# Altium PCB Board_v1_p2.PcbDoc
Units mm, origin at the board's own origin, x right, y up, seen from the top; angles counter-clockwise.
Board outline 33 x 33 mm, 4 copper layers (Top Layer, Layer 1, Layer 2, Bottom Layer), stack 0.904 mm thick; 26 components, 41 nets, 74 pads, 13 vias.
Unrouted connection lines stored in the file: 3.
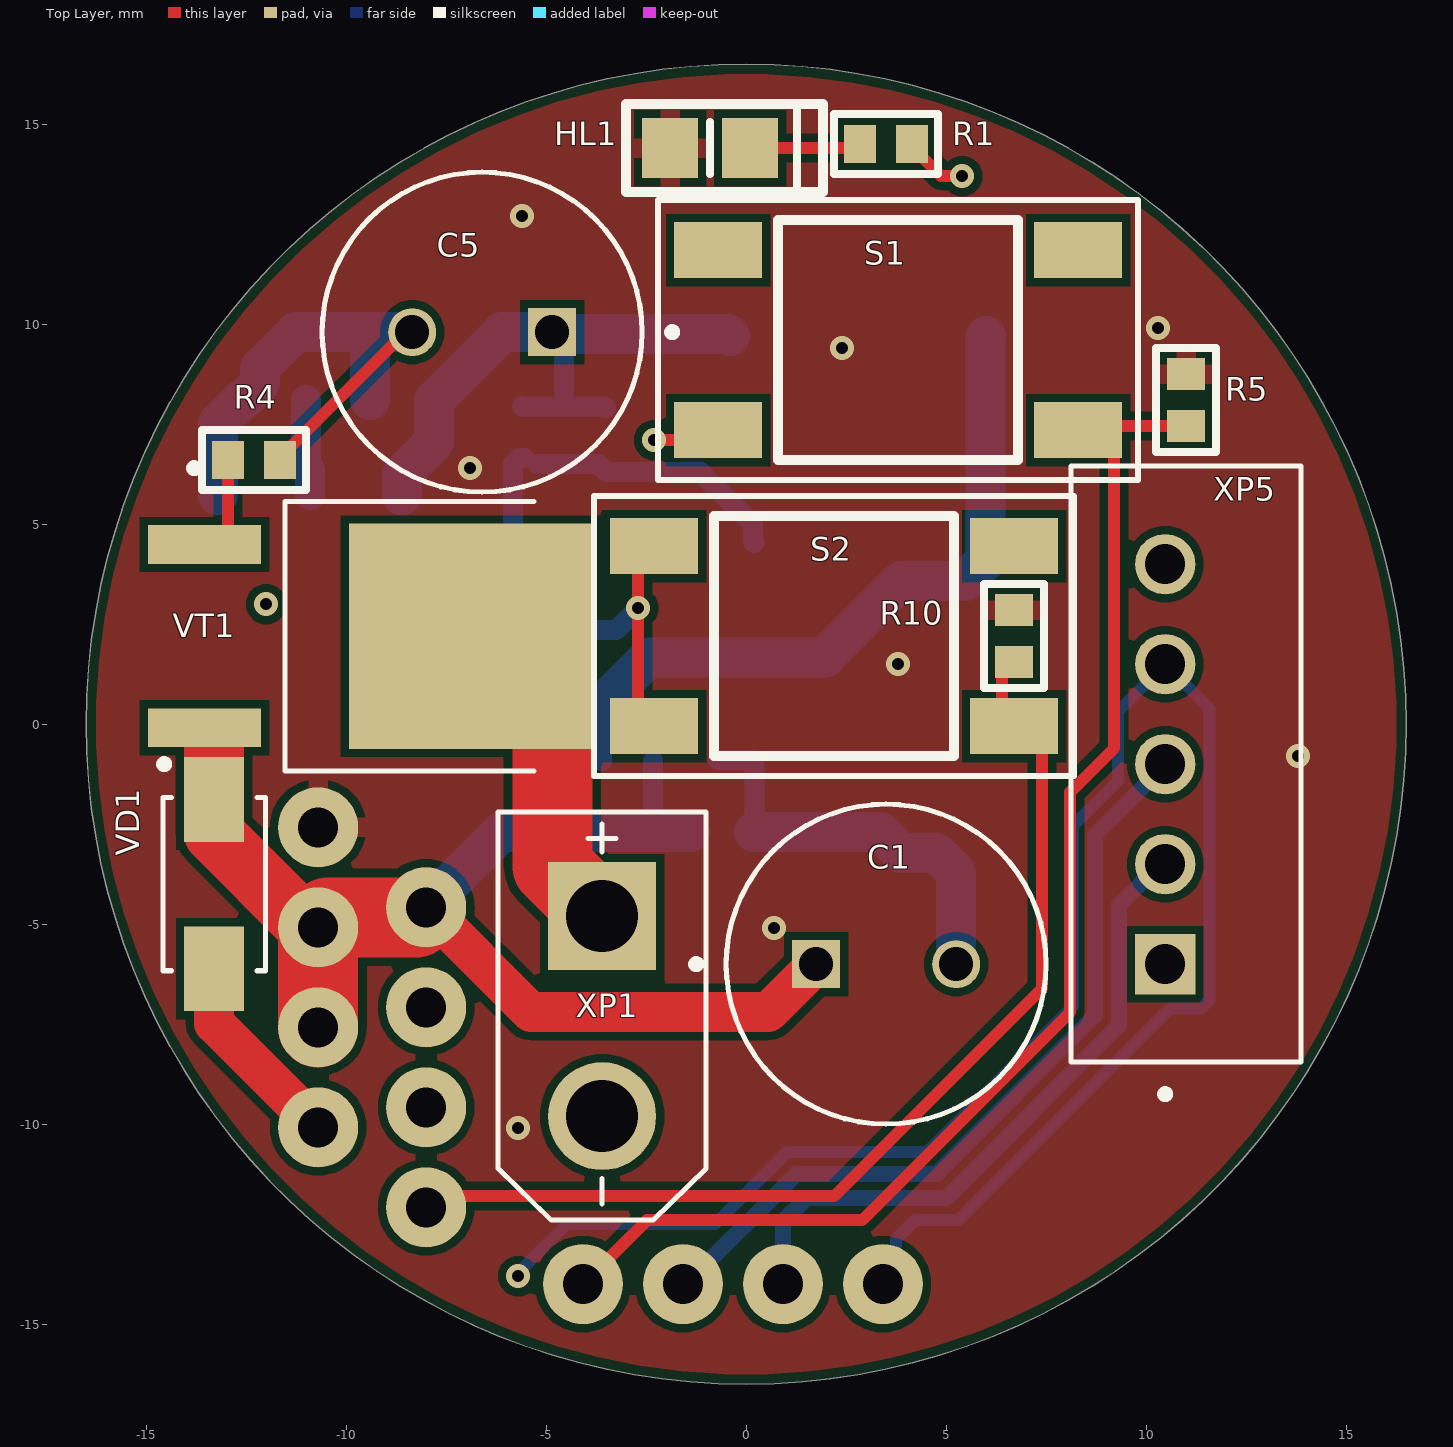
[diagram p0: Top Layer view]
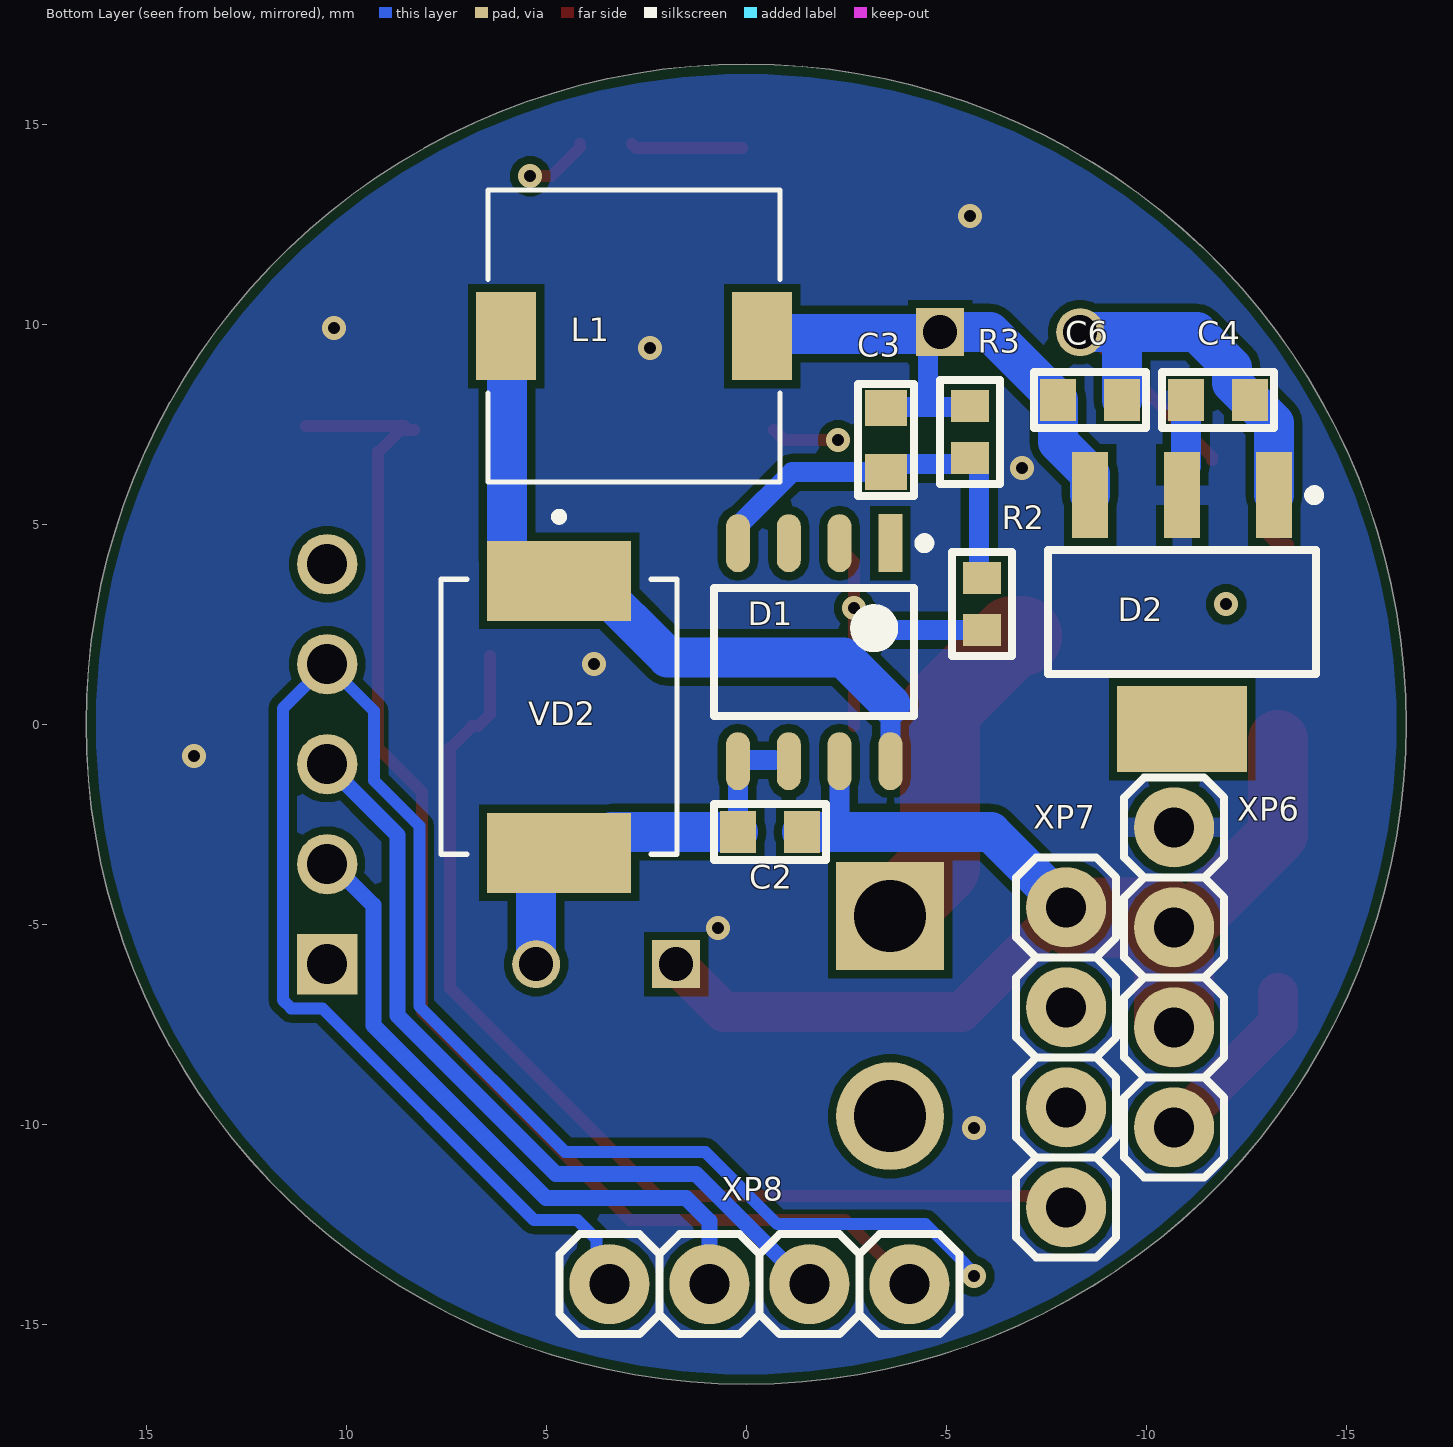
[diagram p1: Bottom Layer view, seen from below]
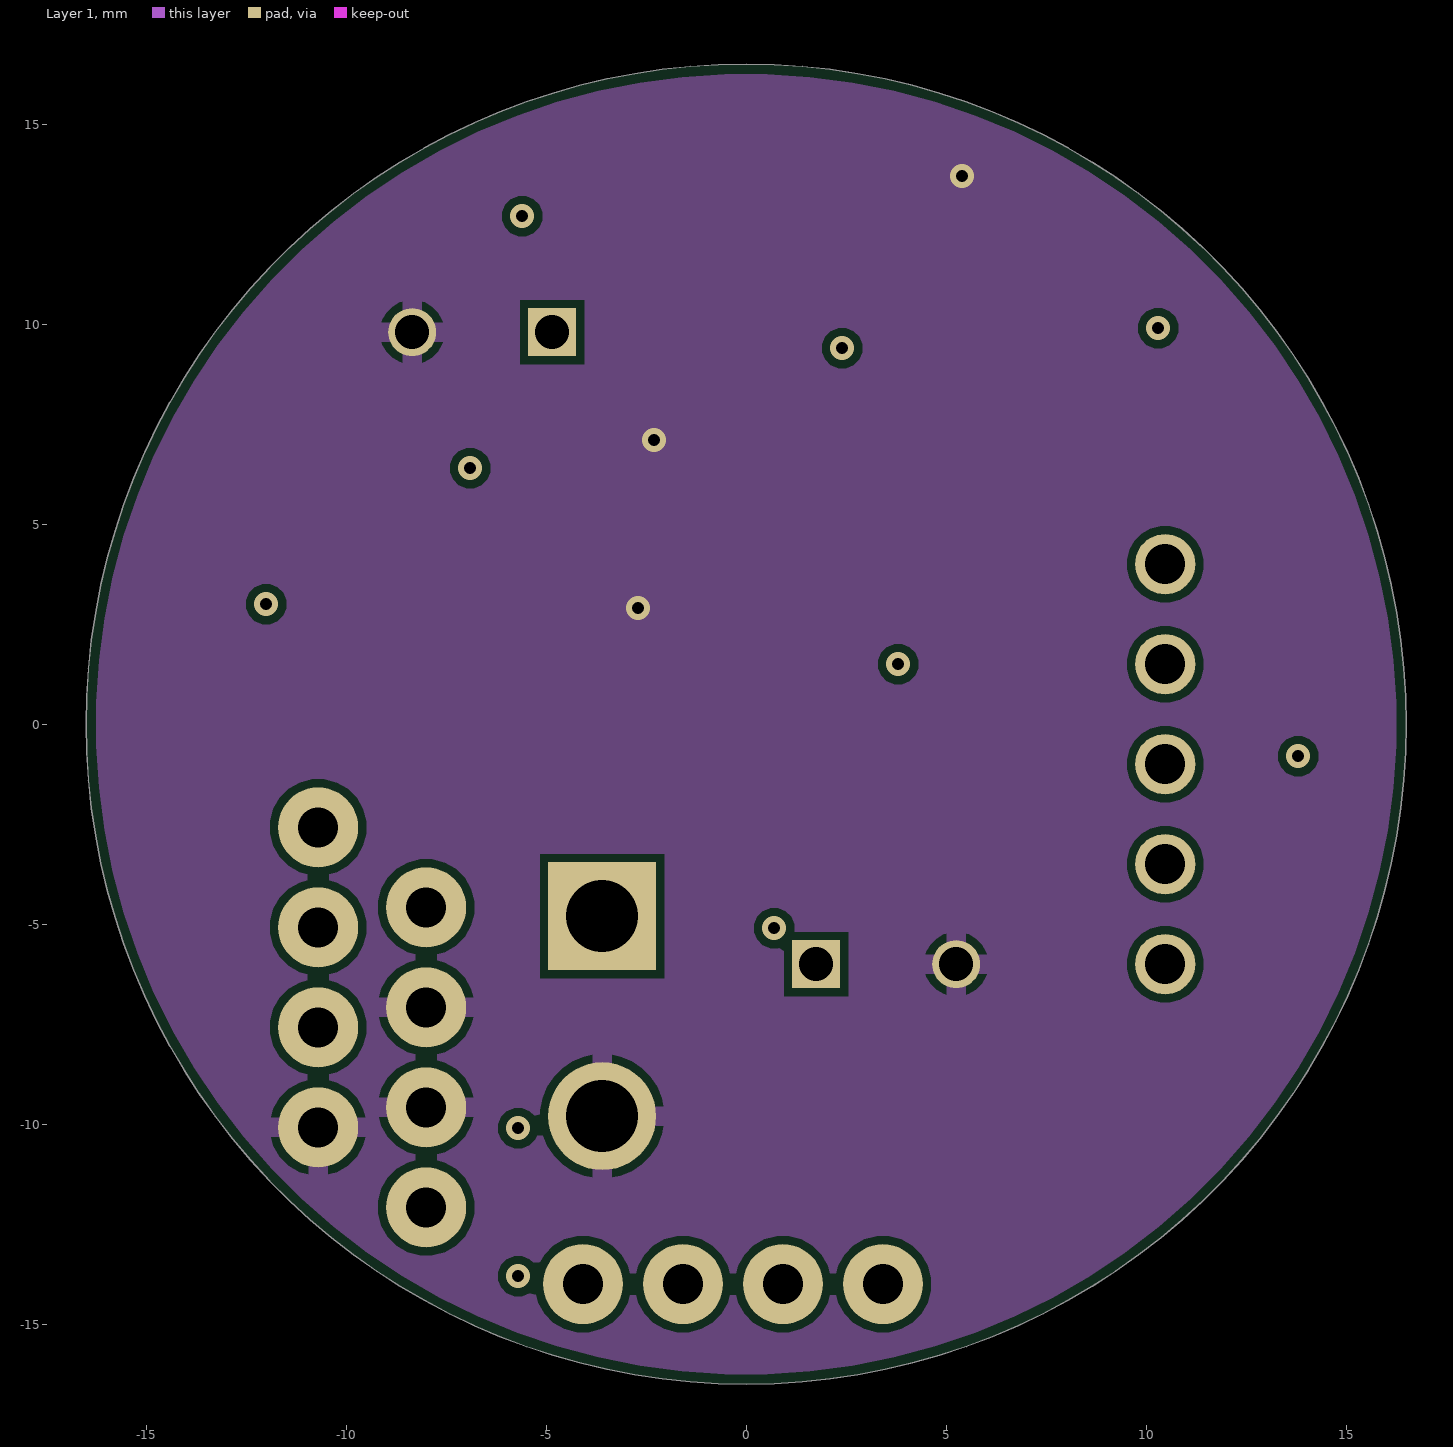
[diagram p2: Layer 1]
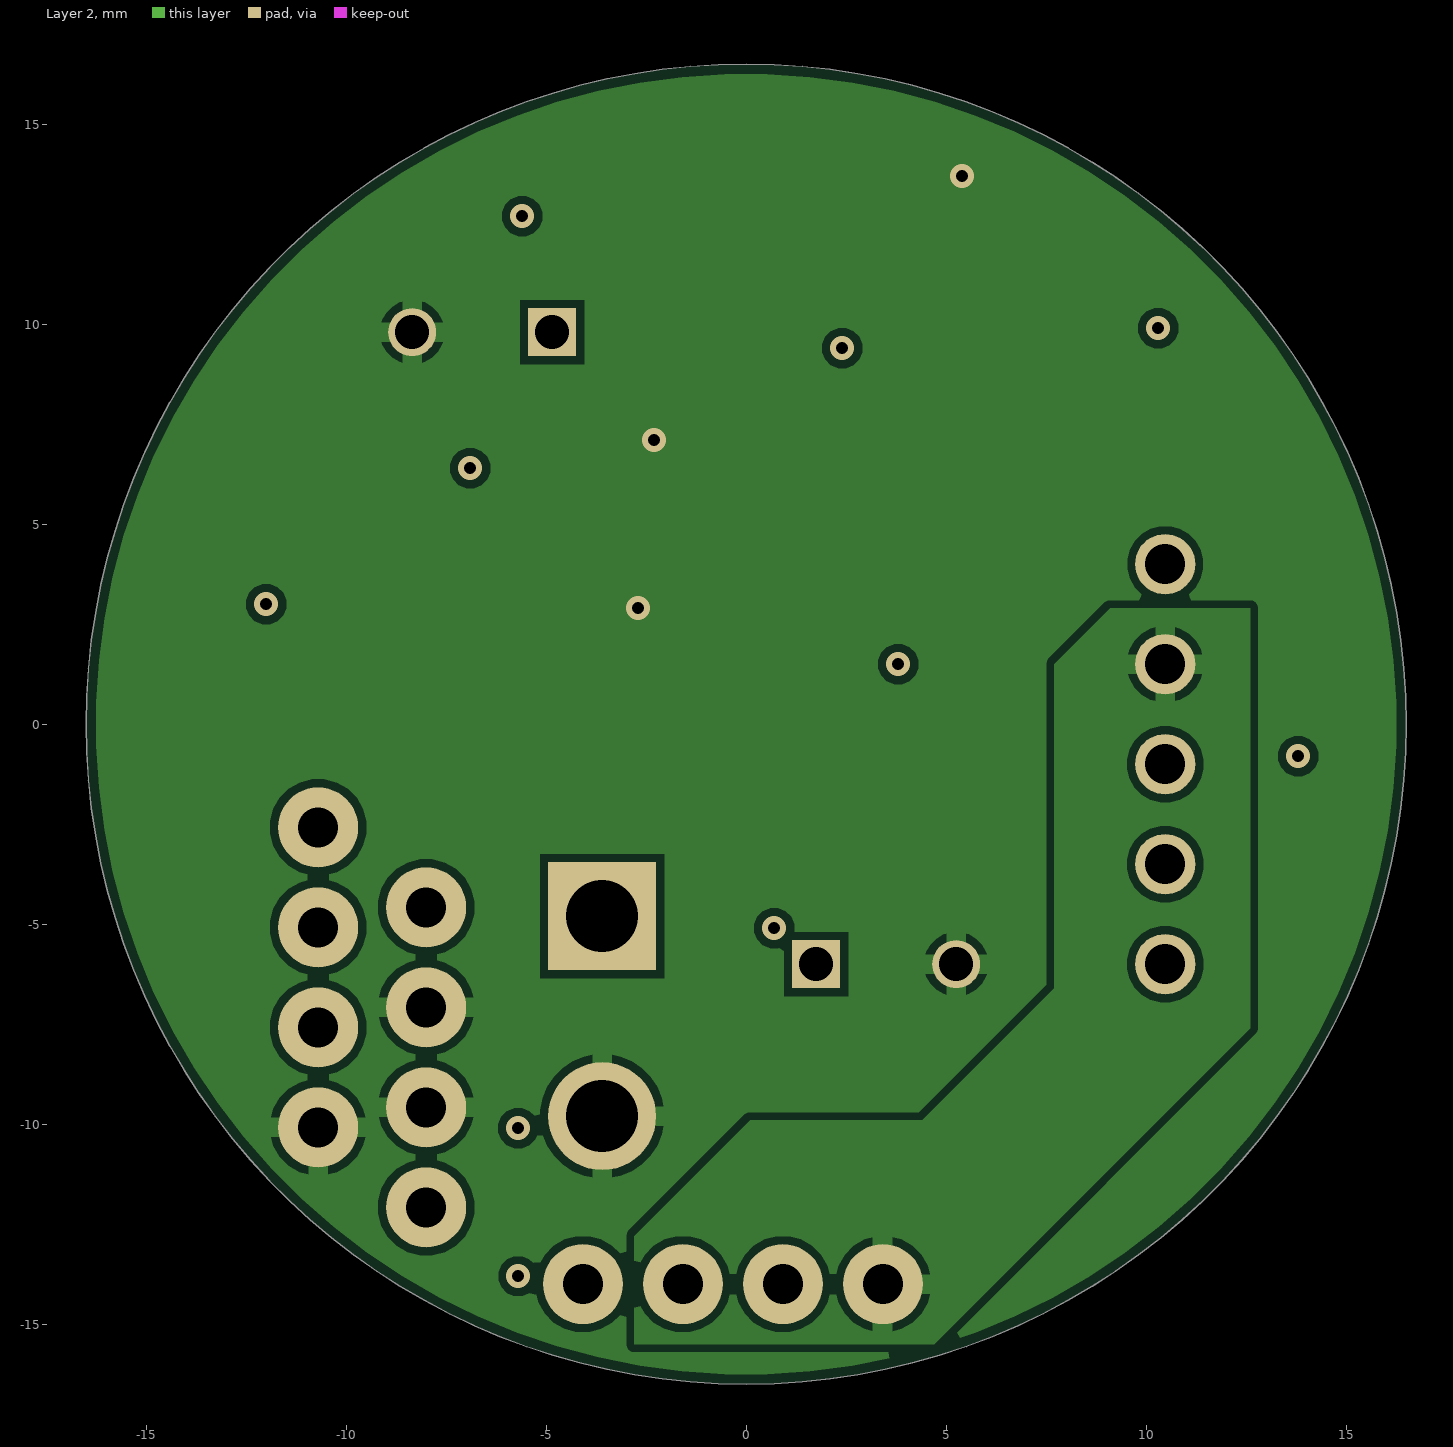
[diagram p3: Layer 2]

## Layer stack, top to bottom
Top Solder: solder mask 0.0254, SM-001, Dk 4
Top Layer: signal copper 0.035
Dielectric 2: prepreg 0.127, FR4, Dk 4.2
Layer 1: signal copper 0.035
Dielectric 1: core 0.51, FR4, Dk 4.6
Layer 2: signal copper 0.035
Dielectric 3: prepreg 0.127, FR4, Dk 4.2
Bottom Layer: signal copper 0.035
Bottom Solder: solder mask 0.0254, SM-001, Dk 4

## Board outline
-16.501,0 ccw(c0,0) 0,-16.501 ccw(c0,0) 16.501,0 ccw(c0,0) 0,16.501 ccw(c0,0)

## Design rules (kind name [scope] priority, off if disabled: settings)
AcuteAngle [All] p1: minimum=3.50000000000000E+0001 checktracksonly=FALSE
BoardOutlineClearance "BoardOutlineClearance 1" [All] p1: gap=0.25 ignorepadtopadclearanceinfootprint=FALSE except(0: Arc-SplitContinuation Track-SplitContinuation SMDPad-SplitContinuation THPad-SplitContinuation Via-SplitContinuation Fill-SplitContinuation Poly-SplitContinuation Region-SplitContinuation Text-SplitContinuation) // Milling
BoardOutlineClearance "BoardOutlineClearance 2" [All] p2: gap=0.4 ignorepadtopadclearanceinfootprint=FALSE except(0: Arc-SplitContinuation Track-SplitContinuation SMDPad-SplitContinuation THPad-SplitContinuation Via-SplitContinuation Fill-SplitContinuation Poly-SplitContinuation Region-SplitContinuation Text-SplitContinuation) // V-Cut
Clearance "Clearance 3 Oz" [All] p1 off: gap=0.35 ignorepadtopadclearanceinfootprint=FALSE except(0.25: Arc-Hole Track-Hole SMDPad-Hole THPad-Hole Via-Hole Fill-Hole Poly-Hole Region-Hole Text-Hole)
Clearance "Clearance 2 Oz" [All] p2 off: gap=0.3 ignorepadtopadclearanceinfootprint=FALSE except(0.25: Arc-Hole Track-Hole SMDPad-Hole THPad-Hole Via-Hole Fill-Hole Poly-Hole Region-Hole Text-Hole)
Clearance "Clearance-1 1 Oz" [All] p3: gap=0.2 ignorepadtopadclearanceinfootprint=FALSE except(0.25: Arc-Hole Track-Hole SMDPad-Hole THPad-Hole Via-Hole Fill-Hole Poly-Hole Region-Hole Text-Hole) // Standart
Clearance "Clearance-2 1 Oz" [All] p4 off: gap=0.15 ignorepadtopadclearanceinfootprint=FALSE except(0.2: Arc-Fill Arc-Poly Track-Fill Track-Poly SMDPad-Fill SMDPad-Poly THPad-Fill THPad-Poly Via-Fill Via-Poly Fill-Fill Fill-Poly Poly-Poly; 0.25: Arc-Hole Track-Hole SMDPad-Hole THPad-Hole Via-Hole Fill-Hole Poly-Hole Region-Hole Text-Hole) // Advance
Clearance "Clearance-1 1/2 Oz" [All] p5 off: gap=0.125 ignorepadtopadclearanceinfootprint=FALSE except(0.2: Arc-Fill Arc-Poly Track-Fill Track-Poly SMDPad-SMDPad SMDPad-Fill SMDPad-Poly THPad-Fill THPad-Poly Via-Fill Via-Poly Fill-Fill Fill-Poly Poly-Poly Poly-Region Poly-Text; 0.25: Arc-Hole Track-Hole SMDPad-Hole THPad-Hole Via-Hole Fill-Hole Poly-Hole Region-Hole Text-Hole) // Standart
Clearance "Clearance-2 1/2 Oz" [All] p6 off: gap=0.1 ignorepadtopadclearanceinfootprint=FALSE except(0.15: Arc-Fill Arc-Poly Track-Fill Track-Poly SMDPad-SMDPad SMDPad-Fill SMDPad-Poly THPad-Fill THPad-Poly Via-Fill Via-Poly Fill-Fill Fill-Poly Poly-Poly Poly-Region Poly-Text; 0.25: Arc-Hole Track-Hole SMDPad-Hole THPad-Hole Via-Hole Fill-Hole Poly-Hole Region-Hole Text-Hole) // Advance
DiffPairsRouting "DiffPairsRouting 1 Oz" [All] p1: maxlimit=0.25 minlimit=0.2 mostfreqgap=0.25 toplayer_minwidth=0.2 toplayer_maxwidth=0.4 toplayer_prefwidth=0.4 midlayer1_minwidth=0.2 midlayer1_maxwidth=0.4 midlayer1_prefwidth=0.4 midlayer2_minwidth=0.2 midlayer2_maxwidth=0.4 midlayer2_prefwidth=0.4 bottomlayer_minwidth=0.2 bottomlayer_maxwidth=0.4 bottomlayer_prefwidth=0.4 maxuncoupledlength=12.7
DiffPairsRouting "DiffPairsRouting 1/2 Oz" [All] p2 off: maxlimit=0.254 minlimit=0.1 mostfreqgap=0.254 toplayer_minwidth=0.1 toplayer_maxwidth=0.381 toplayer_prefwidth=0.381 midlayer1_minwidth=0.1 midlayer1_maxwidth=0.381 midlayer1_prefwidth=0.381 midlayer2_minwidth=0.1 midlayer2_maxwidth=0.381 midlayer2_prefwidth=0.381 bottomlayer_minwidth=0.1 bottomlayer_maxwidth=0.381 bottomlayer_prefwidth=0.381 maxuncoupledlength=12.7
HoleSize "Minimum HoleSize" [IsPad] p1: absolutevalues=TRUE maxlimit=5.9 minlimit=0.6 maxpercent=80.000 minpercent=20.000
HoleSize "Minimum HoleSize VIA 1" [IsVia] p2: absolutevalues=TRUE maxlimit=5.9 minlimit=0.3 maxpercent=80.000 minpercent=20.000 // Standart
HoleSize "Minimum HoleSize VIA 2" [IsVia] p3: absolutevalues=TRUE maxlimit=5.9 minlimit=0.2 maxpercent=80.000 minpercent=20.000 // Advance
HoleToHoleClearance Hole2HoleClearance [All] p1: gap=0.25 allowstackedmicrovias=FALSE
MinimumAnnularRing "Minimum AR VIA Standart" [IsVia] p1: minimumring=0.15
MinimumAnnularRing "Minimum AR PAD Standart" [IsPAD] p2: minimumring=0.2
MinimumAnnularRing "Minimum AR VIA Advance" [IsVia] p3: minimumring=0.1
MinimumAnnularRing "Minimum AR PAD Advance" [IsPAD] p4: minimumring=0.15
MinimumSolderMaskSliver "SolderMask Bridge Standart" [All] p1: minsoldermaskwidth=0.15 // All Masks
MinimumSolderMaskSliver "SolderMask Bridge Advance" [All] p2: minsoldermaskwidth=0.1 // Mask LDI
PlaneClearance "PlaneClearance 3 Oz" [All] p1: clearance=0.35
PlaneClearance "PlaneClearance 2 Oz" [All] p2: clearance=0.3
PlaneClearance "PlaneClearance 1 Oz" [All] p3: clearance=0.2
PlaneClearance "PlaneClearance-1 1/2 Oz" [All] p4: clearance=0.2 // Standart
PlaneClearance "PlaneClearance-2 1/2 Oz" [All] p5: clearance=0.15 // Advance
PlaneConnect "TermalConnect 3 Oz" [All] p1: planeconnectstyle=Relief reliefexpansion=0.2 reliefentries=4 reliefconductorwidth=0.35 reliefairgap=0.35 // Standart
PlaneConnect "TermalConnect 2 Oz" [All] p2: planeconnectstyle=Relief reliefexpansion=0.2 reliefentries=4 reliefconductorwidth=0.3 reliefairgap=0.3 // Standart
PlaneConnect "TermalConnect-1 1 Oz" [All] p3: planeconnectstyle=Relief reliefexpansion=0.2 reliefentries=4 reliefconductorwidth=0.2 reliefairgap=0.2 // Standart
PlaneConnect "TermalConnect-2 1 Oz" [All] p4: pad.planeconnectstyle=Relief pad.reliefexpansion=0.15 pad.reliefentries=4 pad.reliefconductorwidth=0.2 pad.reliefairgap=0.2 via.planeconnectstyle=Direct via.reliefexpansion=0.15 via.reliefentries=4 via.reliefconductorwidth=0.15 via.reliefairgap=0.15 // Advance
PlaneConnect "TermalConnect-1 1/2 Oz" [All] p5: planeconnectstyle=Relief reliefexpansion=0.2 reliefentries=4 reliefconductorwidth=0.2 reliefairgap=0.2 // Standart
PlaneConnect "TermalConnect-2 1/2 Oz" [All] p6: pad.planeconnectstyle=Relief pad.reliefexpansion=0.15 pad.reliefentries=4 pad.reliefconductorwidth=0.15 pad.reliefairgap=0.15 via.planeconnectstyle=Direct via.reliefexpansion=0.15 via.reliefentries=4 via.reliefconductorwidth=0.15 via.reliefairgap=0.15 // Advance
PolygonConnect "PolygonConnect 3 Oz" [All] p1 off: thpad.connectstyle=Relief thpad.reliefconductorwidth=0.35 thpad.reliefentries=4 thpad.polygonreliefangle="90 Angle" thpad.airgapwidth=0.35 smdpad.connectstyle=Relief smdpad.reliefconductorwidth=0.35 smdpad.reliefentries=4 smdpad.polygonreliefangle="90 Angle" smdpad.airgapwidth=0.35 via.connectstyle=Direct via.reliefconductorwidth=0.254 via.reliefentries=4 via.polygonreliefangle="90 Angle" via.airgapwidth=0.254
PolygonConnect "PolygonConnect 2 Oz" [All] p2 off: thpad.connectstyle=Relief thpad.reliefconductorwidth=0.3 thpad.reliefentries=4 thpad.polygonreliefangle="90 Angle" thpad.airgapwidth=0.3 smdpad.connectstyle=Relief smdpad.reliefconductorwidth=0.3 smdpad.reliefentries=4 smdpad.polygonreliefangle="90 Angle" smdpad.airgapwidth=0.3 via.connectstyle=Direct via.reliefconductorwidth=0.254 via.reliefentries=4 via.polygonreliefangle="90 Angle" via.airgapwidth=0.254
PolygonConnect "PolygonConnect-1 1 Oz" [All] p3: thpad.connectstyle=Relief thpad.reliefconductorwidth=0.5 thpad.reliefentries=4 thpad.polygonreliefangle="90 Angle" thpad.airgapwidth=0.2 smdpad.connectstyle=Relief smdpad.reliefconductorwidth=0.5 smdpad.reliefentries=4 smdpad.polygonreliefangle="90 Angle" smdpad.airgapwidth=0.2 via.connectstyle=Direct via.reliefconductorwidth=0.254 via.reliefentries=4 via.polygonreliefangle="90 Angle" via.airgapwidth=0.254 // Standart
PolygonConnect "PolygonConnect-2 1 Oz" [All] p4 off: thpad.connectstyle=Relief thpad.reliefconductorwidth=0.15 thpad.reliefentries=4 thpad.polygonreliefangle="90 Angle" thpad.airgapwidth=0.15 smdpad.connectstyle=Relief smdpad.reliefconductorwidth=0.15 smdpad.reliefentries=4 smdpad.polygonreliefangle="90 Angle" smdpad.airgapwidth=0.15 via.connectstyle=Direct via.reliefconductorwidth=0.254 via.reliefentries=4 via.polygonreliefangle="90 Angle" via.airgapwidth=0.254 // Advance
PolygonConnect "PolygonConnect-1 1/2 Oz" [All] p5 off: thpad.connectstyle=Relief thpad.reliefconductorwidth=0.15 thpad.reliefentries=4 thpad.polygonreliefangle="90 Angle" thpad.airgapwidth=0.2 smdpad.connectstyle=Relief smdpad.reliefconductorwidth=0.2 smdpad.reliefentries=4 smdpad.polygonreliefangle="90 Angle" smdpad.airgapwidth=0.2 via.connectstyle=Direct via.reliefconductorwidth=0.254 via.reliefentries=4 via.polygonreliefangle="90 Angle" via.airgapwidth=0.254 // Standart
PolygonConnect "PolygonConnect-2 1/2 Oz" [All] p6 off: thpad.connectstyle=Relief thpad.reliefconductorwidth=0.125 thpad.reliefentries=4 thpad.polygonreliefangle="90 Angle" thpad.airgapwidth=0.15 smdpad.connectstyle=Relief smdpad.reliefconductorwidth=0.125 smdpad.reliefentries=4 smdpad.polygonreliefangle="90 Angle" smdpad.airgapwidth=0.15 via.connectstyle=Direct via.reliefconductorwidth=0.254 via.reliefentries=4 via.polygonreliefangle="90 Angle" via.airgapwidth=0.254 // Advance
RoutingCorners [All] p1 off: cornerstyle=45-Degree minsetback=2.54 maxsetback=2.54
RoutingVias [All] p1: holewidth=0.3 width=0.6 viastyle="Through Hole" minholewidth=0.2 minwidth=0.4 maxholewidth=5.9 maxwidth=6.4
SilkToSilkClearance Silk2SilkClearance [All] p1 off: silktosilkclearance=0.15
SilkToSolderMaskClearance Silk2SolderMaskClearance [IsPad] p1 off: minsilkscreentomaskgap=0.15 clearancetoexposedcopper=TRUE
SolderMaskExpansion SolderMaskExpansion-1 [All] p1: expansion=0.05 istentingtop=FALSE // Standart
SolderMaskExpansion "SolderMaskExpansion LDI" [All] p2: expansion=0.025 istentingtop=FALSE // Advance
UnRoutedNet [All] p1: checkbadconnections=TRUE
Width "Width 3 Oz" [All] p1 off: maxlimit=10 minlimit=0.35 preferedwidth=0.4 checkconnectedcopper=TRUE
Width "Width 2 Oz" [All] p2 off: maxlimit=10 minlimit=0.3 preferedwidth=0.35 minimp=50.000000 maximp=50.000000 favimp=50.000000 checkconnectedcopper=TRUE
Width "Width 1 Oz" [All] p3: maxlimit=10 minlimit=0.15 preferedwidth=0.2 checkconnectedcopper=TRUE
Width "Width 1/2 Oz" [All] p4 off: maxlimit=10 minlimit=0.1 preferedwidth=0.125 checkconnectedcopper=TRUE
20 further rules are at their usual default settings.

## Classes and differential pairs
component class RS485: XP5
component class "Power 3.3V to mc": C1 C2 C3 C5 C6 D1 D2 HL1 R1 R2 R3 R4 VD1 VD2 VT1
component class MC_stm32: R5 R10 S1 S2
differential pair RS485: +RS485_P -RS485_N

## Components (designator, comment, footprint, x,y, rotation, side; value= is the part's Value field where it differs from the comment)
C1 "Capacitor_polar" RADIAL-2_8mm 3.5,-6 r0 top value="470 мк"
C2 "Capacitor" 0603C -0.6,-2.7 r0 bottom value="1 мк"
C3 "Capacitor" 0603C -3.5,7.1 r90 bottom value="3300 п"
C4 "Capacitor" 0603C -11.8,8.1 r180 bottom value="10 мк"
C5 "Capacitor_polar" RADIAL-2_8mm -6.6,9.8 r180 top value="470 мк"
C6 "Capacitor" 0603C -8.6,8.1 r180 bottom value="0,1 мк"
D1 "LM2594HVM-ADJ" SOIC-8 -1.7,1.8 r270 bottom
D2 "LD1117S33CTR" SOT223 -10.9,2.8 r270 bottom
HL1 "=Value" 0805D -1,14.5 r0 top
L1 "Comment" 7.3x7.3 2.8,9.7 r180 bottom
R1 "Resistor" 0603R 3.5,14.5 r180 top value="1 к"
R2 "Resistor" 0603R -5.9,3 r270 bottom value="1 к"
R3 "Resistor" 0603R -5.6,7.3 r90 bottom value="3 к"
R4 "Resistor" 0603R -12.3,6.6 r0 top value="10 к"
R5 "Resistor" 0603R 11,8.1 r90 top value="10 к"
R10 "Resistor" 0603R 6.7,2.2 r90 top value="10 к"
S1 "Tact_button" Button_SMD_6x6 3.8,9.6 r180 top
S2 "Tact_button" Button_SMD_6x6 2.2,2.2 r180 top
VD1 "SMAJ12CA" SMA -13.3,-4 r270 top value="12 В"
VD2 "SK33" SMC 4.7,0.2 r270 bottom
VT1 "SUD50P06-15" DPAK -9.4,2.2 r270 top
XP1 "XT30" XT30 -3.6,-7.3 r270 top
XP5 "CWF-5" CWF-5 11,-1 r270 top
XP6 "Comment" PLS4 -10.7,-2.5 r180 bottom locked
XP7 "Comment" PLS4 -8,-4.5 r180 bottom locked
XP8 "Comment" PLS4 3.5,-14 r90 bottom locked

## Footprints (in the part's own frame and the unit in brackets; to place one, negate y for a bottom-side part, rotate by r counter-clockwise, add the part's x,y. Pads: shape width x height; smd on the part's side, far side on the other; paste and mask are expansions set on the pad)
7.3x7.3 [mm]
  rect 1.5x2.2 smd: 1(-3.2,0) 2(3.2,0)
  silkscreen extent -3.65,-3.65 3.65,3.65, body extent -3.65,-3.65 3.65,3.65, height 3.5
0603C [mm] "Chip Resistor, 2-Leads, Body 1,40x0,80mm, IPC Medium Density"
  rect 0.9x1.05 smd: 1(-0.8,0) 2(0.8,0)
  silkscreen extent -1.4,-0.7 1.4,0.7, body extent -0.85,-0.45 0.85,0.45, height 0.9
0603R [mm] "Chip Resistor, 2-Leads, Body 1.60x0.85mm, IPC Medium Density"
  rect 0.8x0.95 smd: 1(-0.65,0) 2(0.65,0)
  silkscreen extent -1.3,-0.75 1.3,0.75, body extent -0.87,-0.47 0.88,0.48, height 0.9
0805D [mm]
  rect 1.4x1.5 smd: 1(-0.9,-0.1) 2(1.1,-0.1)
  silkscreen extent -2,-1.2 2.93,1, body extent -0.97,-0.8 1.17,0.6, height 0.7
Button_SMD_6x6 [mm]
  rect 2.2x1.4 smd: 1(-4.5,-2.25) 1(-4.5,2.25) 2(4.5,-2.25) 2(4.5,2.25)
  silkscreen extent -6,-3.5 6,3.5, body extent -5,-3 5,3, height 7.1
CWF-5 [mm] "B5B-XH-A"
  rect 1.508x1.508 / inner round 1.508 / far side rect 1.508x1.508 hole 1: 1(5,-0.525)
  round 1.508 hole 1: 2(2.5,-0.525) 3(0,-0.525) 4(-2.5,-0.525) 5(-5,-0.525)
  silkscreen extent -7.45,-2.88 8.35,2.88, body extent -7.45,-2.88 7.45,2.88, height 7
DPAK [mm]
  rect 0.97x2.83 smd: 1(-2.29,-4.14) 3(2.29,-4.14)
  rect 5.63x6.09 smd: 2(0,2.51)
  silkscreen extent -4.3,-4.5 3.37,4.09, body extent -3.27,-4.96 3.27,4.96, height 2.39
PLS4 [mm]
  round 2 hole 1: 1(0,-0.08) 2(0,-2.58) 3(0,-5.08) 4(0,-7.58)
  silkscreen extent -1.25,-8.83 1.25,1.17, body extent -1.27,-8.93 1.27,1.19, height 8.44
RADIAL-2_8mm [mm]
  rect 1.2x1.2 hole 0.85: 1(-1.75,0)
  round 1.2 hole 0.85: 2(1.75,0)
  silkscreen extent -4.85,-4 4,4, body extent -4,-4 4,4, height 11.5
SMA [mm]
  rect 2.12x1.5 smd: 1(2.115,0) 2(-2.115,0)
  silkscreen extent -3.1,-1.35 2.16,1.28, body extent -2.57,-1.28 2.57,1.28, height 2.5
SMC [mm]
  rect 2x3.6 smd: 1(3.415,0.021) 2(-3.385,0.021)
  silkscreen extent -5.08,-2.93 3.45,2.97, body extent -3.96,-2.93 3.99,2.97, height 2.65
SOIC-8 [mm] "for operational amplifier"
  rect 1.45x0.6 smd: 1(-2.725,1.905)
  oval 1.45x0.6 smd: 2(-2.725,0.635) 3(-2.725,-0.635) 4(-2.725,-1.905) 5(2.725,-1.905) 6(2.725,-0.635) 7(2.725,0.635) 8(2.725,1.905)
  silkscreen extent -2.85,-2.5 1.6,2.88, body extent -3,-2.5 3,2.5, height 1.75
SOT223 [mm] "SOT223, ld1117"
  rect 2.15x0.9 smd: 1(-2.925,2.3) 2(-2.925,0) 3(-2.925,-2.3)
  rect 2.15x3.25 smd: 4(2.925,0)
  silkscreen extent -3.05,-3.35 1.55,3.42, body extent -3.56,-3.3 3.51,3.2, height 1.6
XT30 [mm]
  rect 2.7x2.7 hole 1.8: 1(-2.5,0)
  round 2.7 hole 1.8: 2(2.5,0)
  silkscreen extent -5.1,-2.6 5.1,2.6, body extent -5.1,-2.6 5.1,2.6, height 10.7

## Part data
C1: library part "4,7 мк", "Конденсатор электролит. 470 мкФ, 50 В, 8 мм", Part Number=Capacitor_polar
C2 C3 C4 C6: library part "0,1 мк", "Конденсатор", Part Number=Capacitor
C5: library part "4,7 мк", "Полярный конденсатор", Part Number=Capacitor_polar
D1: "Импульсный DC-DC преобразователь, вход до 60 вольт, регулируемый выход, выходной ток 2 Ампера"
D2: "Линейный стабилизатор напряжения 3,3 вольта. Максимальный ток - 0,8 ампер, гарантированное падение напряжения 1,3 вольта"
HL1: library part LED, "Светодиод SMD 0805, 30 мА, 2.1 В", Case=-, Color=Красный, Datasheet=-, Manufacturer=-, Notice=-, Rate=-, Shop=-
R1: "Резистор SMD, 43 Ом"
R2: "0.1Вт 0603 1 кОм, 1%. Чип резистор (SMD)"
R3: "0.1Вт 0603 1 кОм, 1%, Чип резистор (SMD)"
R4: "Резистор", Part Number=Resistor
R5: "0603 10 кОм, 1%, Чип резистор (SMD)"
R10: "0603 100 кОм, 1%, Чип резистор (SMD)"
S1 S2: "Тактовая кнопка", Part Number=Tact_button
VD1: "Защитный диод на 12 В, рассеиваемая мощность 400 Вт", Power (W)=400, Voltage nominal (V)=12, Part Number=SMAJ12CA
VD2: "Диод шоттки на 30 В, номинальный ток 3 А", Current (A)=3, Voltage nominal (V)=30, Part Number=SK33
VT1: "P-канальный MOSFET", Part Number=SUD50P06-15
XP1: "2-пиновый разъем с ключом", Value1=+U_in, Value2=GND, Part Number=XT30
XP5: "5-пиновый разъем с ключом", Value1=NC, Value2=RS485_A, Value3=RS485_B, Value4=GND_SIGNAL, Part Number=CWF-5, Value5=NC

## Via types
v1: diameter 0.6, hole 0.3, Top Layer to Bottom Layer, 13 vias

## Nets (pads, with @x,y where several pads share a name; then routed paths per layer and width w, separated by ;. In a path a pad name is that pad's centre, name@x,y a point inside that pad or via, vN(x,y) a via of type N, cw(c..) or ccw(c..) an arc to the next point about the centre after c; other vN are vias at no path point)
"+3,3 В": C4.1 D2.2 HL1.1 R5.2 R10.2 XP6.1 | length 2.4
  Bottom Layer w0.75: C4.1 -11,6.45 -10.9,6.35 D2.2
  other v1: -5.7,-10.1 0.7,-5.1 13.8,-0.8 3.8,1.5 -6.9,6.4 2.4,9.4 10.3,9.9 -5.6,12.7
"+5 В": 
"+12 В": C1.1 C2.1 D1.7 VD1.2 VT1.3 XP6.2 XP6.3 XP7.1 | length 31.9
  Top Layer w1: XP7.1 -5.38,-7.2 0.55,-7.2 C1.1
  Top Layer w1.5: VT1.3@-13.3,-0.4 VD1.2 -13.3,-2.738 -11.053,-4.984 -10.796,-4.984 XP6.2
  Top Layer w2: XP6.3 XP6.2 -10.45,-4.83 -8.25,-4.83 XP7.1
  Bottom Layer w0.5: D1.7 -2.335,-2.565 -2.2,-2.7
  Bottom Layer w1: XP7.1 -6.12,-2.7 -2.2,-2.7 C2.1
BUTTON: R5.1 S1.1 XP8.4 | length 33
  Top Layer w0.3: XP8.4 -2.48,-12.4 2.9,-12.4 8.1,-7.2 8.1,-1.7 9.2,-0.6 9.2,6.8 8.65,7.35 S1.1@8.3,7.35 ; S1.1@8.55,7.45 R5.1
GND: C1.2 C2.2 C4.2 C5.2 C6.2 D1.5 D1.6 D2.1 R1.1 R2.2 R4.2 S1.2 S2.2 VD1.1 VD2.1 XP1.2 XP6.4 XP7.2 XP7.3 | length 40.5
  Top Layer w0.3: R4.2 -11.65,6.675 -8.525,9.8 C5.2 ; S2.2@-2.7,-0.05 -2.7,2.761 v1(-2.7,2.9) -2.7,4.05 S2.2@-2.3,4.45 ; v1(-2.3,7.1) -0.95,7.1 S1.2@-0.7,7.35 ; R1.1 4.15,14.425 4.875,13.7 v1(5.4,13.7)
  Top Layer w1: VD1.1@-13.3,-6.715 -13.3,-7.48 XP6.4
  Bottom Layer w0.5: R2.2 -3.25,2.35 v1(-2.7,2.9) ; -0.7,-0.9 D1.5@0.18,-0.9 ; C2.2@0.202,-2.697 0.202,-0.928 D1.5
  Bottom Layer w1: D2.1 -13.2,7.525 -12.625,8.1 C4.2 -12.575,8.1 -12.15,8.525 -12.15,8.915 -11.265,9.8 -9.4,9.8 ; C6.2 -9.4,9.8 ; C5.2 -9.4,9.8 ; C2.2@0.202,-2.697 C2.2 3.364,-2.7 3.879,-3.215 VD2.1 4.75,-3.215 5.25,-3.715 C1.2
GND_SIGNAL: XP5.4 XP8.1 | length 46.7
  Bottom Layer w0.3: v1(-5.7,-13.8) -5.7,-13.719 -5.43,-13.449 -5.43,-13.441 -4.489,-12.5 -0.78,-12.5 1.022,-10.697 4.525,-10.697 8.171,-7.051 8.171,-2.542 9.3,-1.413 9.3,0.325 XP5.4 11.579,0.396 11.579,-6.899 11.374,-7.104 10.596,-7.104 5.303,-12.397 4.219,-12.397 3.745,-12.871 3.745,-13.675 XP8.1
LED_ERROR: 
LED_OK: 
NetC3_1: C3.1 D1.4 R2.1 R3.1 | length 9.7
  Bottom Layer w0.5: R2.1 -5.825,3.725 -5.825,6.5 -5.675,6.65 R3.1@-5.55,6.65 ; R3.1@-5.2,6.5 -3.7,6.5 C3.1 -1.145,6.3 0.172,4.983 0.172,4.558 D1.4
NetC3_2: C3.2 C5.1 C6.1 D2.3 L1.2 R3.2 | length 15.1
  Bottom Layer w0.5: R3.2 -5.575,7.925 -4.55,7.925 ; -5.6,9.675 -5.475,9.8 ; C5.1 -4.8,9.75 -4.55,9.5 -4.55,7.925 ; C3.2 -3.525,7.925 -4.55,7.925
  Bottom Layer w1: D2.3 -8.6,6.25 -7.8,7.05 C6.1 -6.1,9.8 -5.475,9.8 C5.1 ; C5.1@-4.8,9.75 -0.45,9.75 L1.2
NetC14_1: R10.1 S2.1 XP7.4 | length 26.5
  Top Layer w0.3: XP7.4 -7.72,-11.8 2.2,-11.8 7.4,-6.6 7.4,-0.6 6.85,-0.05 6.7,-0.05 6.4,0.25 R10.1@6.4,1.706
NetC15_1: 
NetC16_1: 
NetD1_8: D1.8 L1.1 VD2.2 | length 18.1
  Bottom Layer w0.5: D1.8 -3.605,0.495
  Bottom Layer w1: -3.605,0.495 -2.429,1.671 1.965,1.671 3.879,3.585 5.479,3.585 5.979,4.085 5.979,9.679 L1.1
NetDD1_29: 
NetDD1_30: 
NetDD1_31: 
NetDD1_44: 
NetDD2_2: 
NetDD2_4: 
NetDD2_7: 
NetDD2_10: 
NetDD2_12: 
NetDD2_14: 
NetHL1_2: HL1.2 R1.2 | length 2.8
  Top Layer w0.3: HL1.2 2.75,14.4 R1.2
NetHL2_2: 
NetHL3_2: 
NetR4_1: R4.1 VT1.1 | length 2.5
  Top Layer w0.3: VT1.1 -13.285,4.49 -12.95,4.825 R4.1
NetR8_2: 
NetVT1_2: VT1.2 XP1.1 | length 8.5
  Top Layer w2: VT1.2 -6.66,2.2 -4.845,0.385 -4.845,-3.555 XP1.1
NetVT2_3: 
RS485_N: XP5.3 XP8.3 | length 20.1
  Bottom Layer w0.4: XP8.3 -1.58,-13.969 -1.471,-13.969 1.25,-11.247 4.753,-11.247 8.721,-7.279 8.721,-2.77 9.391,-2.1 10.451,-1.04 10.475,-1.016 XP5.3
RS485_P: XP5.2 XP8.2 | length 16.6
  Bottom Layer w0.4: XP8.2 0.92,-12.426 1.499,-11.847 5.001,-11.847 9.321,-7.528 9.321,-4.523 10.344,-3.5 XP5.2
SERVO1_DIR: 
SERVO1_FB: 
SERVO1_PWM: 
SERVO2_DIR: 
SERVO2_FB: 
SERVO2_PWM: 
SWCLOCK: 
SWDIO: 
pads on no net: D1.1 D1.2 D1.3 D2.4 XP5.1 XP5.5
copper on no net:
  other v1: -12,3

## Polygon pours and split planes (outlines as drawn)
GND on Layer 2 "GND_L03_P004" (solid, pour order 4): -16.501,0 ccw(c0,0) 0,-16.501 ccw(c0,0) 16.501,0 ccw(c0,0) 0,16.501 ccw(c0,0)
GND_SIGNAL on Layer 2 "GND_SIGNAL_L03_P003" (solid, pour order 3): 7.7,1.5 9.1,2.9 12.6,2.9 12.6,-7.6 4.7,-15.5 -2.8,-15.5 -2.8,-12.8 0.1,-9.9 4.4,-9.9 7.7,-6.6
GND on Layer 1 "GND_L02_P002" (solid, pour order 2): -16.501,0 ccw(c0,0) 0,-16.501 ccw(c0,0) 16.501,0 ccw(c0,0) 0,16.501 ccw(c0,0)
"+3,3 В" on Bottom Layer "+3,3_В_L04_P001" (solid, pour order 1): -16.501,0 ccw(c0,0) 0,-16.501 ccw(c0,0) 16.501,0 ccw(c0,0) 0,16.501 ccw(c0,0)
"+3,3 В" on Top Layer "+3,3_В_L01_P000" (solid, pour order 0): -16.501,0 ccw(c0,0) 0,-16.501 ccw(c0,0) 16.501,0 ccw(c0,0) 0,16.501 ccw(c0,0)